# Altium PCB CX3_Camera_Layout.PcbDoc
Units mil, origin at the board's own origin, x right, y up, seen from the top; angles counter-clockwise.
Board outline 2130 x 2465 mil, 6 copper layers (Top Layer, Internal Plane 1, Internal Plane 4, Internal Plane 2, Internal Plane 3, Bottom Layer), stack 48.468 mil thick; 126 components, 115 nets, 551 pads, 0 vias.
Unrouted connection lines stored in the file: 364.
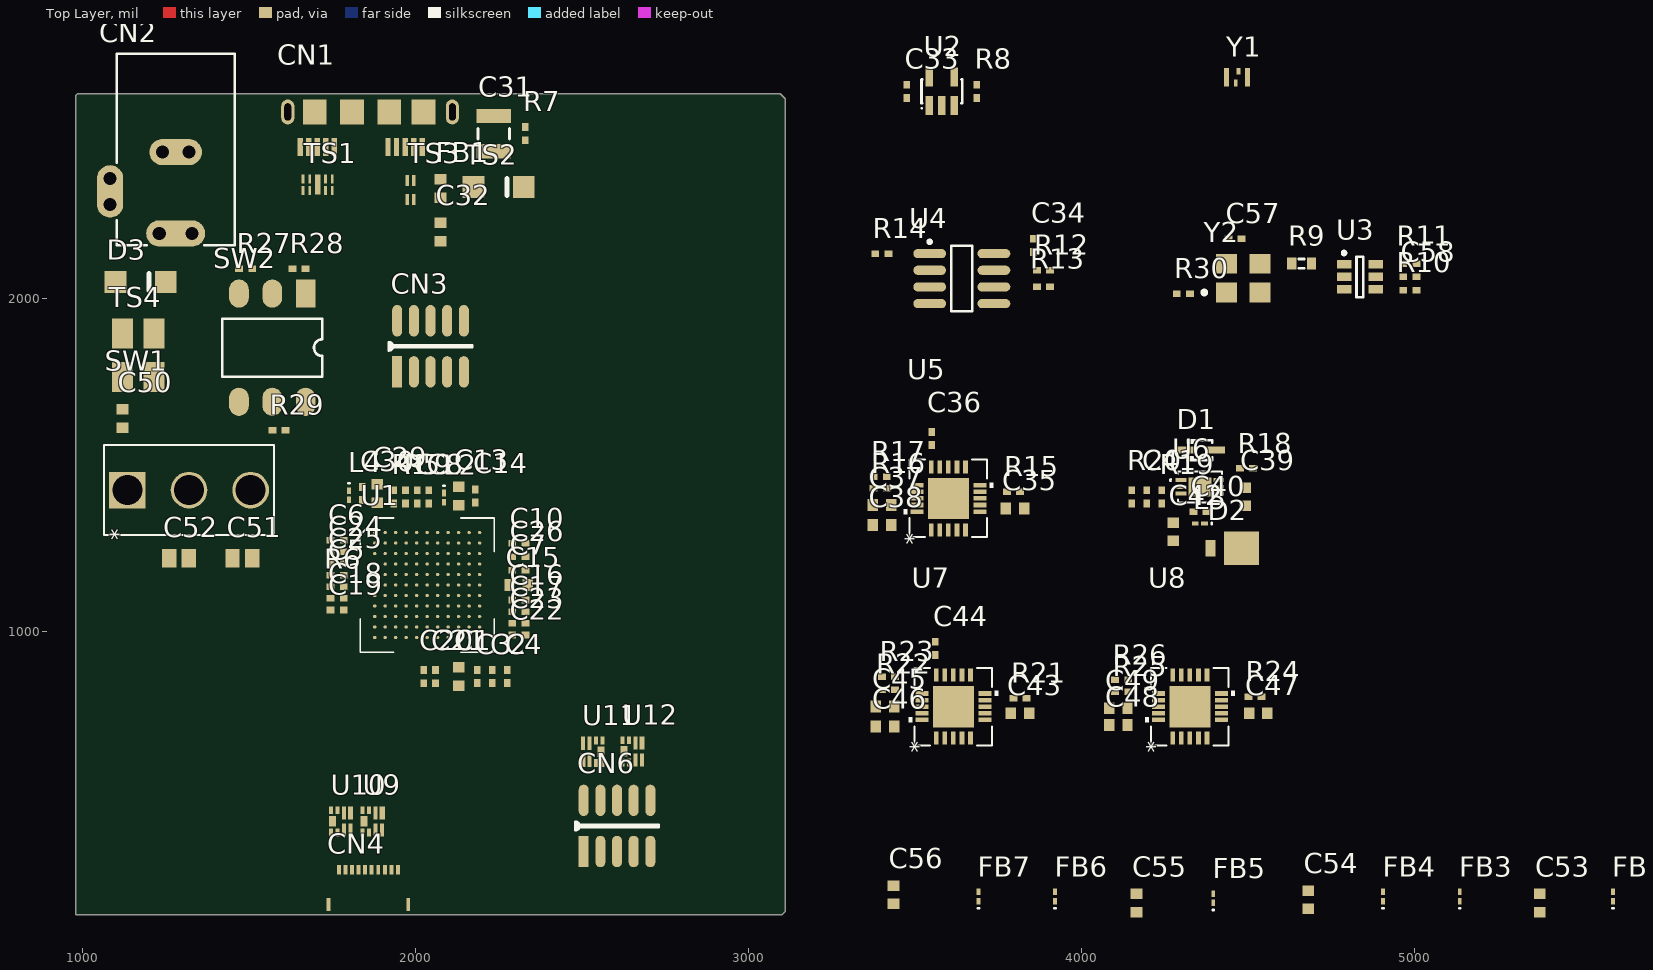
[diagram p0: Top Layer view]
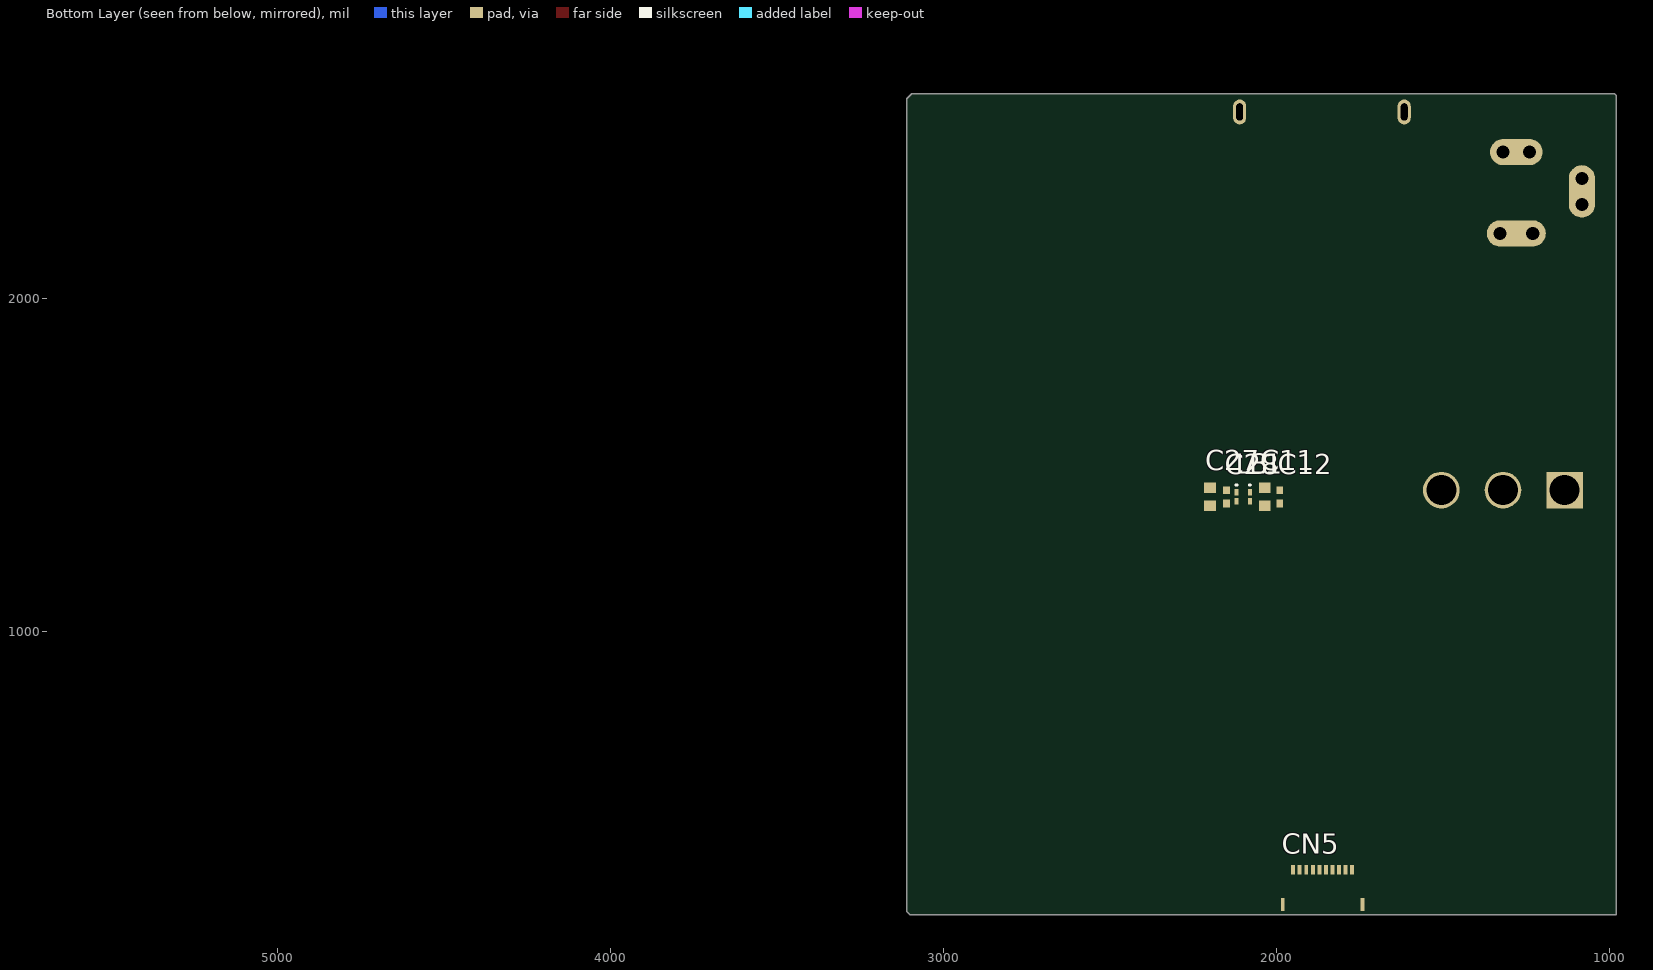
[diagram p1: Bottom Layer view, seen from below]
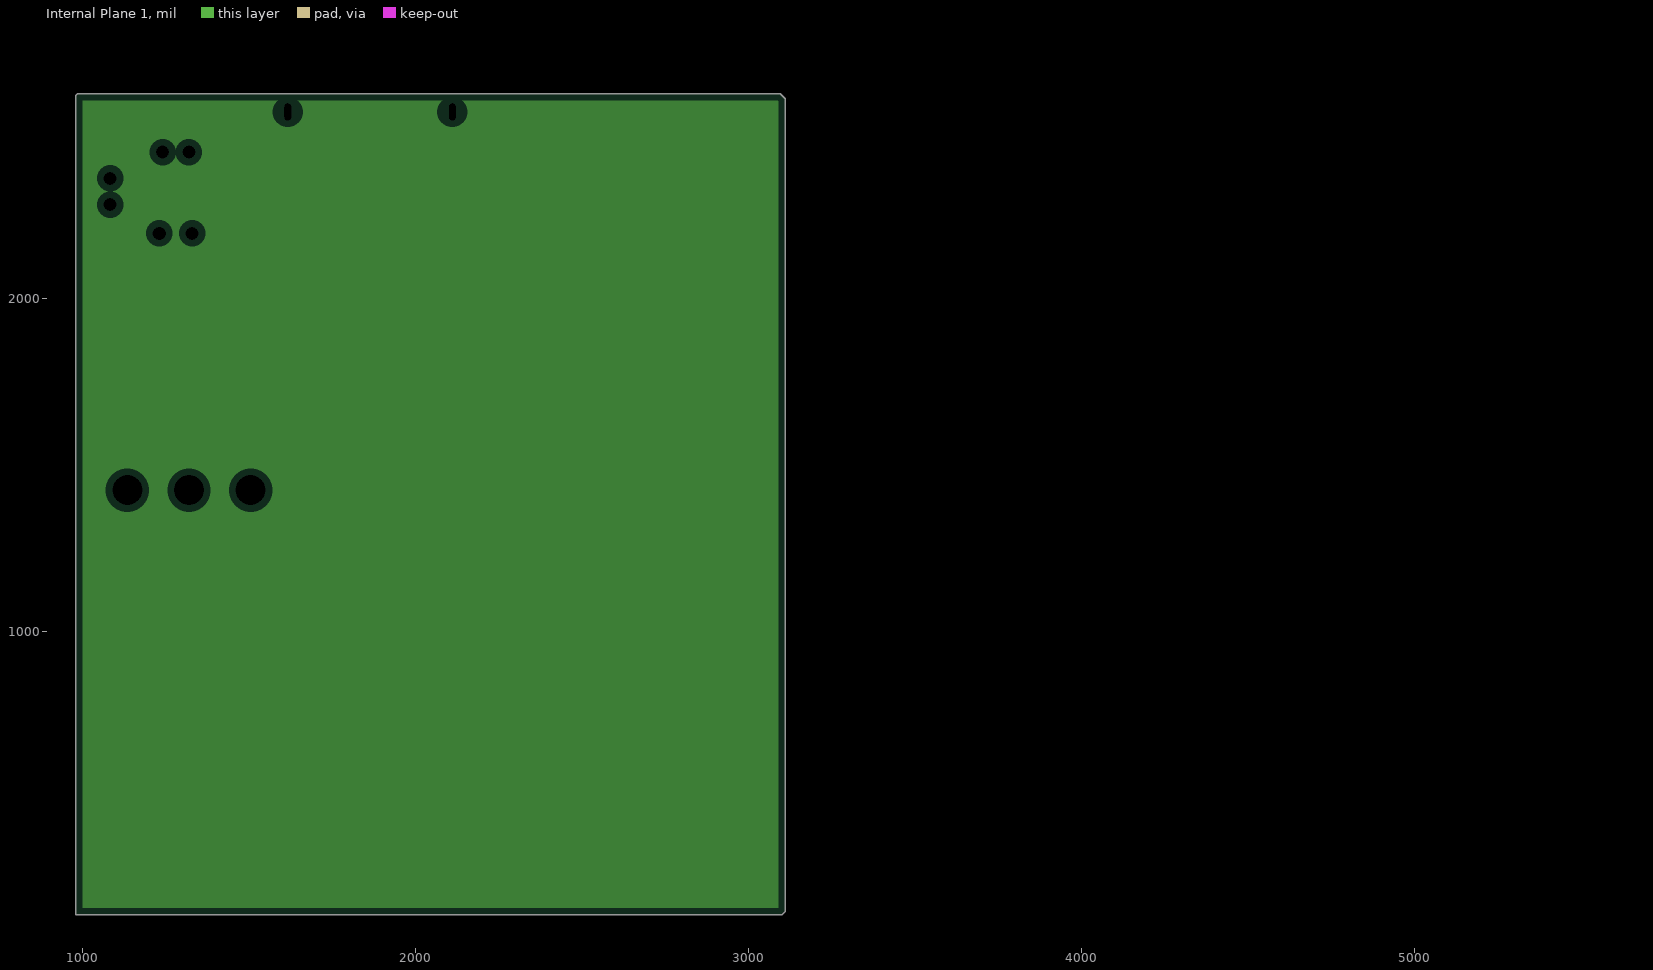
[diagram p2: Internal Plane 1, clearances drawn from the general rule]
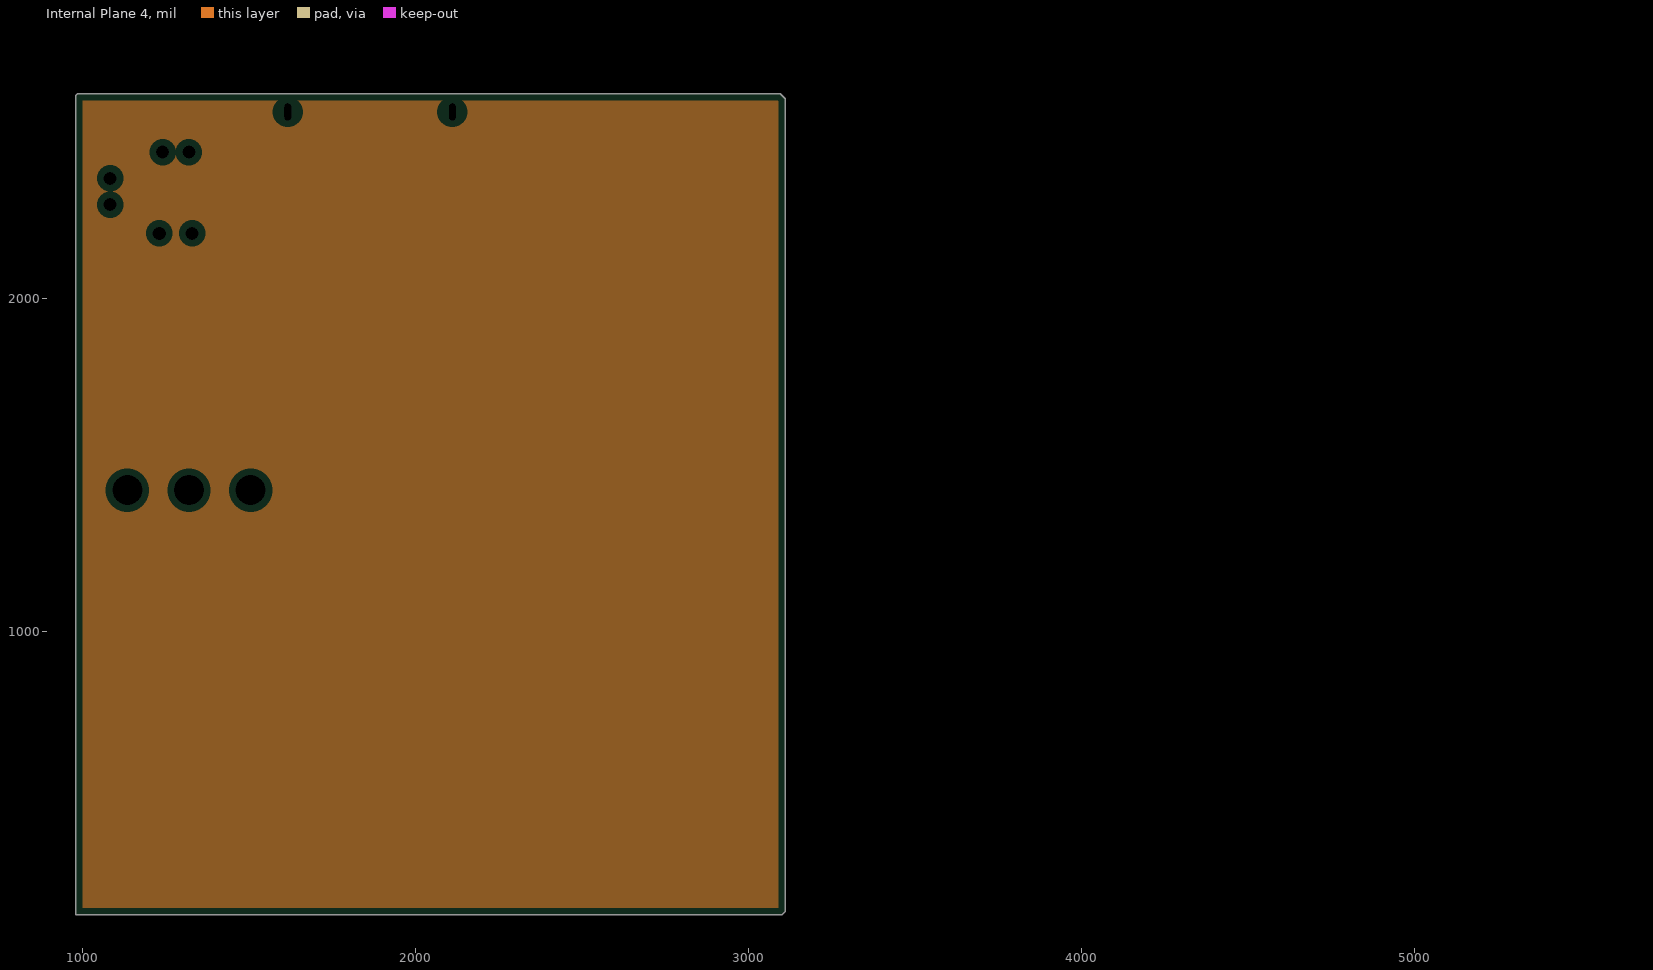
[diagram p3: Internal Plane 4, clearances drawn from the general rule]
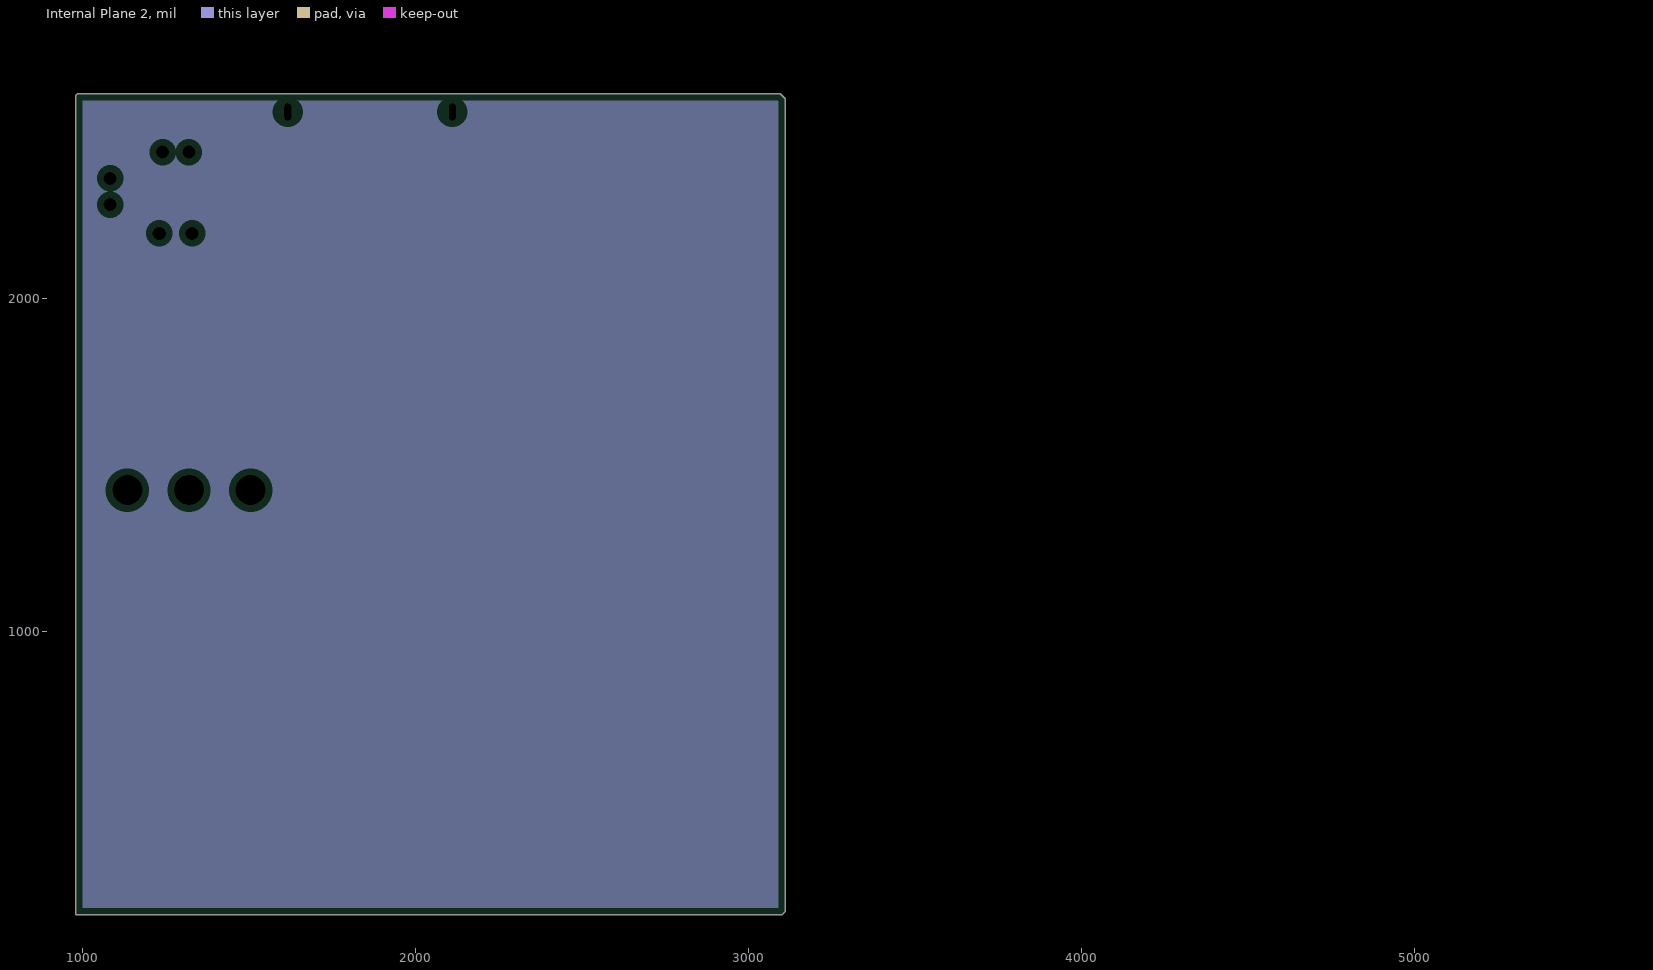
[diagram p4: Internal Plane 2, clearances drawn from the general rule]
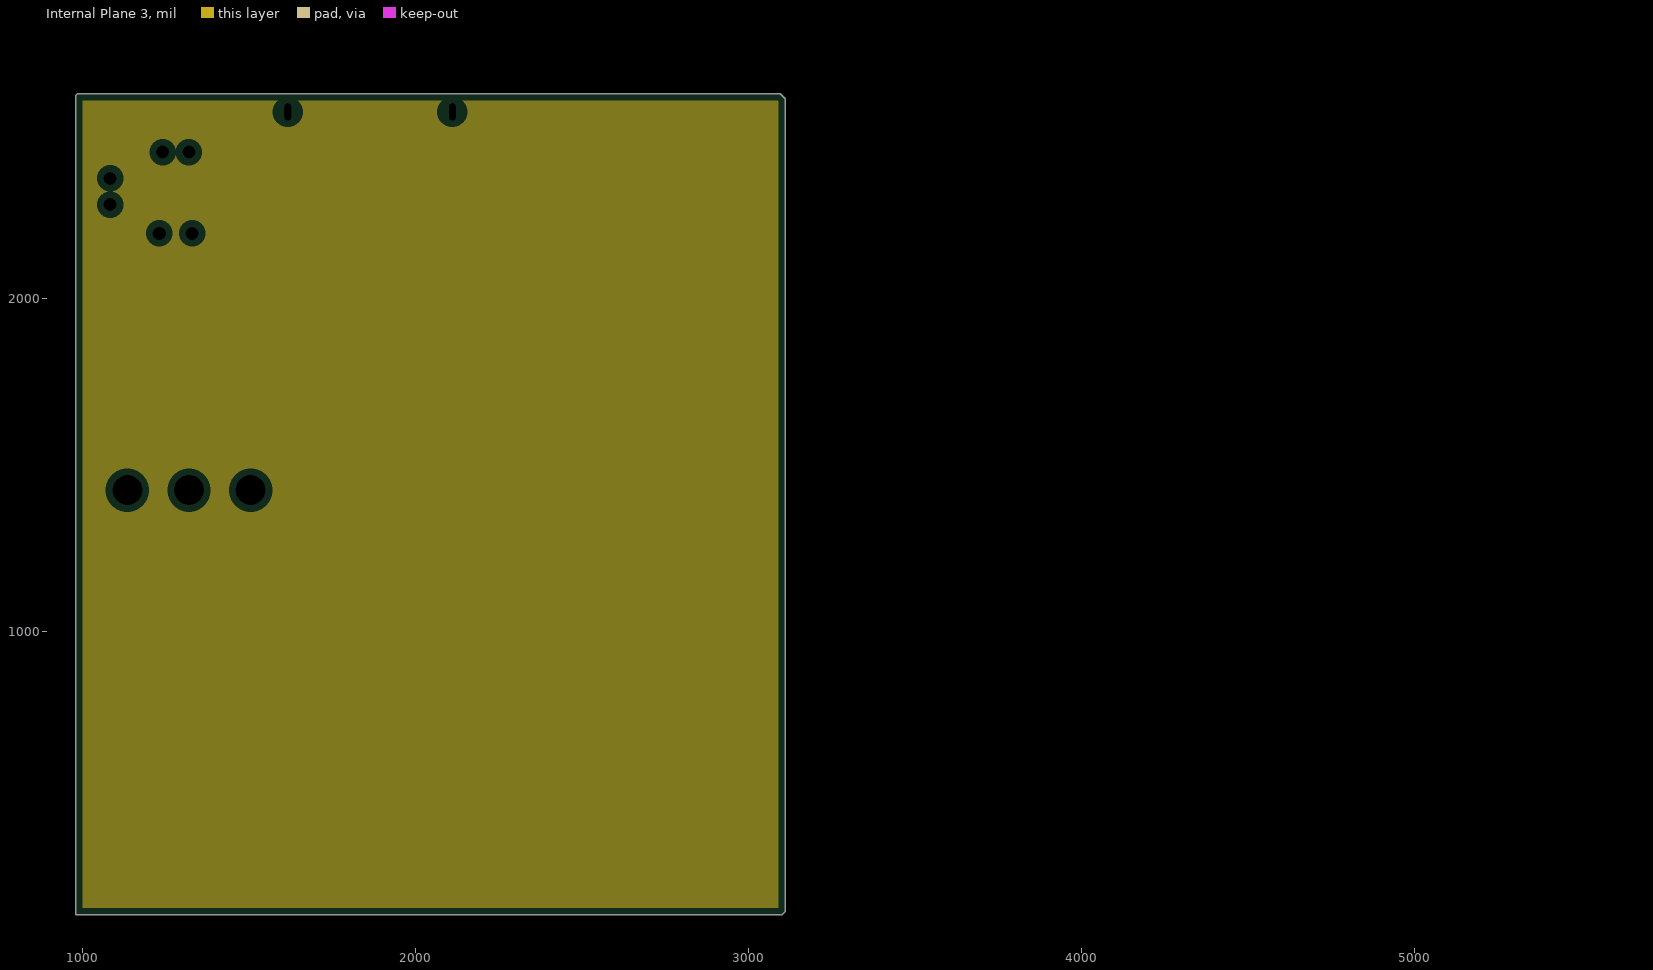
[diagram p5: Internal Plane 3, clearances drawn from the general rule]

## Layer stack, top to bottom
Top Solder: solder mask 0.4, Solder Resist, Dk 3.5
Top Layer: signal copper 1.4
Dielectric 1: core 10, FR-4, Dk 4.2
Internal Plane 1: plane copper 1.417
Dielectric 5: prepreg 5, Dk 4.2
Internal Plane 4: plane copper 1.417
Dielectric 2: core 10, Dk 4.2
Internal Plane 2: plane copper 1.417
Dielectric 4: prepreg 5, Dk 4.2
Internal Plane 3: plane copper 1.417
Dielectric 3: core 10, Dk 4.2
Bottom Layer: signal copper 1.4
Bottom Solder: solder mask 0.4, Solder Resist, Dk 3.5

## Board outline
980,150 980,2610 985,2615 3095,2615 3110,2600 3110,160 3100,150

## Design rules (kind name [scope] priority, off if disabled: settings)
Clearance [All] p1: gap=3.54
DiffPairsRouting [All] p1: maxlimit=10 minlimit=3.54 mostfreqgap=10 toplayer_minwidth=3.54 toplayer_maxwidth=15 toplayer_prefwidth=5 bottomlayer_minwidth=3.54 bottomlayer_maxwidth=15 bottomlayer_prefwidth=5 maxuncoupledlength=500
PlaneClearance [All] p1: clearance=20
PlaneConnect [All] p1: planeconnectstyle=Relief reliefexpansion=20 reliefentries=4 reliefconductorwidth=10 reliefairgap=10
PolygonConnect [All] p1: connectstyle=Relief reliefconductorwidth=10 reliefentries=4 polygonreliefangle="90 Angle" airgapwidth=10
RoutingVias [All] p1: holewidth=8 width=16 viastyle="Through Hole" minholewidth=5.91 minwidth=12 maxholewidth=28 maxwidth=50
SolderMaskExpansion [All] p1: expansion=4
Width [All] p1: maxlimit=20 minlimit=3.54 preferedwidth=5
27 further rules are at their usual default settings.

## Classes and differential pairs
net class USB: NetC8_1 NetC9_1 USB2_DATA_M USB2_DATA_P USB_SSRX_M USB_SSRX_P USB_SSTX_M USB_SSTX_P
net class MIPI: MIPI_CLKN MIPI_CLKP MIPI_DAT0_N MIPI_DAT0_P MIPI_DAT1_N MIPI_DAT1_P MIPI_DAT2_N MIPI_DAT2_P MIPI_DAT3_N MIPI_DAT3_P

## Components (designator, comment, footprint, x,y, rotation, side; value= is the part's Value field where it differs from the comment)
C1 "4.7uF 16V" 1608[0603] 2130,865 r270 top
C2 "0.1uF" 0402 2230,865.32 r270 top
C3 "0.1uF" 0402 2185,865.32 r270 top
C4 "10000pF" 0402 2275,865.32 r270 top
C5 "0.1uF" 0402 1765,1170 r180 top
C6 "0.1uF" 0402 1765,1275 r180 top
C7 "0.1uF" 0402 2310,1185 r180 top
C8 "0.1uF" 0402 2040,1405 r90 top
C9 "0.1uF" 0402 2005,1405 r90 top
C10 "10000pF" 0402 2310,1265 r0 top
C11 "4.7uF 16V" 1608[0603] 2035,1405 r270 bottom
C12 "0.1uF" 0402 1990,1405 r90 bottom
C13 "4.7uF 16V" 1608[0603] 2130,1407.56 r270 top
C14 "0.1uF" 0402 2180,1407.56 r90 top
C15 "22uF 16V" 1608[0603] 2310,1140 r180 top
C16 "0.1uF" 0402 2310,1095 r180 top
C17 "10000pF" 0402 2310,1060 r180 top
C18 "0.1uF" 0402 1765,1100 r0 top
C19 "10000pF" 0402 1765,1065 r0 top
C20 "0.1uF" 0402 2025,865 r90 top
C21 "10000pF" 0402 2060,865 r90 top
C22 "0.1uF" 0402 2310,990 r180 top
C23 "10000pF" 0402 2310,1025 r180 top
C24 "0.1uF" 0402 1765,1240 r0 top
C25 "10000pF" 0402 1765,1205 r0 top
C26 "0.1uF" 0402 2310,1225 r180 top
C27 "22uF 16V" 1608[0603] 2200,1405 r270 bottom
C28 "0.1uF" 0402 2150,1405 r90 bottom
C29 "22uF 16V" 1608[0603] 1885,1414.69 r270 top
C30 "0.1uF" 0402 1840,1414.69 r90 top
C31 "0.047uF" C1210 2235,2495 r270 top
C32 "4.7uF 16V" 1608[0603] 2075,2200 r90 top
C33 "0.1uF" 0402 3475,2622.32 r270 top
C34 "0.1uF" 0402 3855,2160 r90 top
C35 "22uF 16V" 1608[0603] 3800,1370 r180 top
C36 "0.1uF" 0402 3550,1580 r90 top
C37 "22uF 16V" 1608[0603] 3400,1380 r0 top
C38 "4.7uF 16V" 1608[0603] 3400,1320 r0 top
C39 "22uF 16V" 1608[0603] 4490,1405 r270 top
C40 "0.1uF" 0402 4355,1360 r0 top
C41 "120pF" 0402 4195,1405 r90 top
C42 "22uF 16V" 1608[0603] 4275,1300 r90 top
C43 "22uF 16V" 1608[0603] 3815,755 r180 top
C44 "0.1uF" 0402 3560,950 r270 top
C45 "22uF 16V" 1608[0603] 3410,775 r0 top
C46 "4.7uF 16V" 1608[0603] 3410,715 r0 top
C47 "22uF 16V" 1608[0603] 4530,755 r180 top
C48 "22uF 16V" 1608[0603] 4110,720 r0 top
C49 "4.7uF 16V" 1608[0603] 4110,770 r0 top
C50 "22uF 16V" 1608[0603] 1120,1640 r90 top
C51 "22uF 16V" C0805 1480,1220 r0 top
C52 "4.7uF 16V" C0805 1290,1220 r0 top
C53 "4.7uF 16V" 1608[0603] 5375,185 r90 top
C54 "4.7uF 16V" 1608[0603] 4680,195 r90 top
C55 "4.7uF 16V" 1608[0603] 4165,185 r90 top
C56 "4.7uF 16V" 1608[0603] 3435,210 r90 top
C57 "0.1uF" 0402 4460,2180 r180 top
C58 "0.1uF" 0402 4985,2065 r0 top
CN1 "GSB343K33HR" USB3MICROB 2020,2455 r180 top
CN2 "PJ-102B" KLD-0202 1280,2735 r270 top
CN3 "FTSH-105-01-F-DV-K" FTSH-105-01-F-DV-K 1945,1780 r90 top
CN4 "5034801000" 5034801000 1770,285 r0 top
CN5 "5034801000" 5034801000 1950,285 r180 bottom
CN6 "FTSH-105-01-F-DV-K" FTSH-105-01-F-DV-K 2505,340 r90 top
D1 "BAT54HT1G" SOD-323 4355,1545 r180 top
D2 "MBRM140T3G" DO-216AA 4480,1250 r180 top
D3 "BAT54HT1G" DO-214AC 1250,2050 r180 top
FB1 "BLM03AX100SN1D" 1608[0603] 2075,2330 r270 top
FB2 "BLM03AX100SN1D" 0603 5595,205 r90 top
FB3 "BLM03AX100SN1D" 0603 5135,205 r90 top
FB4 "BLM03AX100SN1D" 0603 4905,205 r90 top
FB5 "BLM03AX100SN1D" 0603 4395,200 r90 top
FB6 "BLM03AX100SN1D" 0603 3920,205 r90 top
FB7 "BLM03AX100SN1D" 0603 3690,205 r90 top
L1 "100nH, 300mA" 0603 2080,1405 r270 bottom
L2 "100nH, 300mA" 0603 2085,1402.56 r270 top
L3 "100nH, 300mA" 0603 2120,1405 r270 bottom
L4 "100nH, 300mA" 0603 1800,1409.69 r270 top
L5 "2.2uH, 1.72A" 0603 4355,1325 r180 top
R1 "22E" 0402 1935,1405 r90 top
R5 "10K" 0402 1970,1405 r270 top
R6 "10K" 0402 1765,1135 r0 top
R7 "1M" 0402 2330,2495 r270 top
R8 "10K" 0402 3685,2622.32 r270 top
R9 "22E" J1-0603 4660,2105 r0 top
R10 "22E" 0402 4985,2025 r180 top
R11 "22E" 0402 4985,2105 r180 top
R12 "4.7K" 0402 3885,2085 r0 top
R13 "100K 1%" 0402 3885,2035 r0 top
R14 "4.7K" 0402 3400,2135 r180 top
R15 "10K" 0402 3795,1420 r180 top
R16 "3.57K 1%" 0402 3395,1430 r0 top
R17 "1.15K 1%" 0402 3395,1465 r180 top
R18 "10K" 0402 4495,1490 r180 top
R19 "26.1K 1%" 0402 4240,1405 r90 top
R20 "20K 1%" 0402 4150,1405 r90 top
R21 "10K" 0402 3815,800 r180 top
R22 "3.57K 1%" 0402 3420,825 r0 top
R23 "1.43K 1%" 0402 3420,865 r180 top
R24 "10K" 0402 4520,805 r180 top
R25 "2.49K 1%" 0402 4120,820 r0 top
R26 "4.99K 1%" 0402 4120,855 r180 top
R27 "10K" 0402 1490,2090 r180 top
R28 "10K" 0402 1650,2090 r0 top
R29 "10K" 0402 1590,1605 r180 top
R30 "10K" 0402 4305,2015 r180 top
SW1 "1101M2S3CQE2" 1101M2S3CQE2 1505,1425 r90 top
SW2 "SDA03H0SBR" SDA03H0SBR 1670,2015 r270 top
TS1 "RCLAMP0524J.TCT" RCLAMP0524J 1750,2325 r180 top
TS2 "SMAJ5.0A" DO-214AC 2325,2335 r180 top
TS3 "744230900" 744230900 1995,2355 r270 top
TS4 "DLW5BSN102SQ2L" SRF0504-102Y 1215,1765 r180 top
U1 "CYUSB3065" BGA121C80P11X11_1000X1000X170B30N 2035,1140 r0 top
U2 "NCP361SNT1G" SOT-23-5 3580,2622.32 r0 top
U3 "SN74LVC2G17DBVR" SOT-23_A_N 4835,2065 r0 top
U4 "M25P40-VMN6PB" SO8_M 3640,2060 r0 top
U5 "TPS74801RGWR" RGW20_3P15X3P15 3600,1400 r90 top
U6 "LT3503EDCB#TRMPB" DFN-6_DCB 4355,1435 r0 top
U7 "TPS74801RGWR" RGW20_3P15X3P15 3615,775 r90 top
U8 "TPS74801RGWR" RGW20_3P15X3P15 4325,775 r90 top
U9 "SZEMI2121MTTAG" SZEMI2121MTTAG 1900,405 r180 top
U10 "SZEMI2121MTTAG" SZEMI2121MTTAG 1805,405 r180 top
U11 "SZEMI2121MTTAG" SZEMI2121MTTAG 2502.91,665 r0 top
U12 "SZEMI2121MTTAG" SZEMI2121MTTAG 2680,615 r180 top
Y1 "SIT1533AI-H4-DCC-32.768E" SIT1533 4435,2665 r0 top
Y2 "SG-210STF 19.2000ML" SG5032 4435,2105 r0 top

## Footprints (in the part's own frame and the unit in brackets; to place one, negate y for a bottom-side part, rotate by r counter-clockwise, add the part's x,y. Pads: shape width x height; smd on the part's side, far side on the other; paste and mask are expansions set on the pad)
0402 [mm] "Chip Capacitor, Body 1.0x0.5mm, IPC High Density"
  rect 0.6x0.5 smd: 1(-0.5,0) 2(0.5,0)
  body extent -0.55,-0.3 0.55,0.3, height 1.3
0603 [mm] "Chip Inductor, Body 0.6x0.3mm, IPC High Density"
  rect 0.5x0.3 smd: 1(-0.35,0) 2(0.35,0)
  silkscreen extent -0.9,-0.05 -0.9,0.05, body extent -0.33,-0.18 0.33,0.18, height 0.55
1101M2S3CQE2 [mil]
  rect 110x110 / inner round 60 / far side rect 110x110 hole 90: 1(0,370)
  round 110 / inner round 60 / far side round 110 hole 90: 2(0,185) 3(0,0)
  silkscreen extent -135,-70 135,440, body extent -138,-65 134,435, height 522
1608[0603] [mm] "Chip Capacitor, Body 1.6x0.8mm, IPC High Density"
  rect 0.8x0.9 smd: 1(-0.7,0) 2(0.7,0)
  body extent -0.87,-0.48 0.87,0.48, height 1.3
744230900 [mm] "Common Mode Choke"
  rect 0.85x0.25 smd: 1(0,0) 2(1.45,0) 3(0,-0.5) 4(1.45,-0.5)
5034801000 [mm]
  rect 0.3x0.7 smd: 1(0,0) 2(0.5,0) 3(1,0) 4(1.5,0) 5(2,0) 6(2.5,0) 7(3,0) 8(3.5,0) 9(4,0) 10(4.5,0)
  rect 0.3x1 smd: 11(-0.79,-2.65) 20(5.29,-2.65)
  body extent -1.15,-3.3 5.55,0.3, height 1.88
BGA121C80P11X11_1000X1000X170B30N [mm] "Ball Grid Array (BGA), 0.80 mm pitch,square;121 pin,10.00 mm L X 10.00 mm W X 1.70 mm H body"
  round 0.25 smd: A1(-4,4) A2(-3.2,4) A3(-2.4,4) A4(-1.6,4) A5(-0.8,4) A6(0,4) A7(0.8,4) A8(1.6,4) A9(2.4,4) A10(3.2,4) A11(4,4) B1(-4,3.2) B2(-3.2,3.2) B3(-2.4,3.2) B4(-1.6,3.2) B5(-0.8,3.2) B6(0,3.2) B7(0.8,3.2) B8(1.6,3.2) B9(2.4,3.2) B10(3.2,3.2) B11(4,3.2) C1(-4,2.4) C2(-3.2,2.4) C3(-2.4,2.4) C4(-1.6,2.4) C5(-0.8,2.4) C6(0,2.4) C7(0.8,2.4) C8(1.6,2.4) C9(2.4,2.4) C10(3.2,2.4) C11(4,2.4) D1(-4,1.6) D2(-3.2,1.6) D3(-2.4,1.6) D4(-1.6,1.6) D5(-0.8,1.6) D6(0,1.6) D7(0.8,1.6) D8(1.6,1.6) D9(2.4,1.6) D10(3.2,1.6) D11(4,1.6) E1(-4,0.8) E2(-3.2,0.8) E3(-2.4,0.8) E4(-1.6,0.8) E5(-0.8,0.8) E6(0,0.8) E7(0.8,0.8) E8(1.6,0.8) E9(2.4,0.8) E10(3.2,0.8) E11(4,0.8) F1(-4,0) F2(-3.2,0) F3(-2.4,0) F4(-1.6,0) F5(-0.8,0) F6(0,0) F7(0.8,0) F8(1.6,0) F9(2.4,0) F10(3.2,0) F11(4,0) G1(-4,-0.8) G2(-3.2,-0.8) G3(-2.4,-0.8) G4(-1.6,-0.8) G5(-0.8,-0.8) G6(0,-0.8) G7(0.8,-0.8) G8(1.6,-0.8) G9(2.4,-0.8) G10(3.2,-0.8) G11(4,-0.8) H1(-4,-1.6) H2(-3.2,-1.6) H3(-2.4,-1.6) H4(-1.6,-1.6) H5(-0.8,-1.6) H6(0,-1.6) H7(0.8,-1.6) H8(1.6,-1.6) H9(2.4,-1.6) H10(3.2,-1.6) H11(4,-1.6) J1(-4,-2.4) J2(-3.2,-2.4) J3(-2.4,-2.4) J4(-1.6,-2.4) J5(-0.8,-2.4) J6(0,-2.4) J7(0.8,-2.4) J8(1.6,-2.4) J9(2.4,-2.4) J10(3.2,-2.4) J11(4,-2.4) K1(-4,-3.2) K2(-3.2,-3.2) K3(-2.4,-3.2) K4(-1.6,-3.2) K5(-0.8,-3.2) K6(0,-3.2) K7(0.8,-3.2) K8(1.6,-3.2) K9(2.4,-3.2) K10(3.2,-3.2) K11(4,-3.2) L1(-4,-4) L2(-3.2,-4) L3(-2.4,-4) L4(-1.6,-4) L5(-0.8,-4) L6(0,-4) L7(0.8,-4) L8(1.6,-4) L9(2.4,-4) L10(3.2,-4) L11(4,-4)
  silkscreen extent -5.21,-5.11 5.11,5.21, body extent -5,-5 5,5, height 1.7
C0805 [mm] "Chip Capacitor, Body 2.0x1.3mm, IPC High Density"
  rect 1.1x1.4 smd: 1(-0.75,0) 2(0.75,0)
  body extent -1.1,-0.72 1.1,0.72, height 1.4
C1210 [mm] "Chip Capacitor, Body 3.2x2.5mm, IPC High Density"
  rect 1.1x2.6 smd: 1(-1.35,0) 2(1.35,0)
  silkscreen extent -0.4,-1.2 0.4,1.2, body extent -1.7,-1.35 1.7,1.35, height 1.3
DFN-6_DCB [mil]
  rect 32x12 smd: 1(-57,19.68) 2(-57,0) 3(-57,-19.68) 4(57,-19.68) 5(57,0) 6(57,19.68)
  rect 69x57 smd paste-34: 7(0,0)
  silkscreen extent -90,-46 66,46, body extent -63,-42 63,42, height 32
DO-214AC [mm]
  rect 1.65x1.67 smd: 1(0,0) 2(3.83,0)
  silkscreen extent 1.27,-0.63 1.27,0.64
DO-216AA [mil] "DO-216AA"
  rect 105.12x100 smd: 1(0,0)
  rect 30x50 smd: 2(92.56,0)
FTSH-105-01-F-DV-K [mm]
  rect 2.4x0.76 smd: 1(0,0)
  oval 2.4x0.76 smd: 2(3.9,0) 3(0,-1.27) 4(3.9,-1.27) 5(0,-2.54) 6(3.9,-2.54) 7(0,-3.81) 8(3.9,-3.81) 9(0,-5.08) 10(3.9,-5.08)
  silkscreen extent 1.63,-5.71 2.27,0.64, body extent -1.06,-5.71 4.79,0.63, height 6.11
J1-0603 [mm] "Chip Resistor, Body 1.6x0.8mm, IPC High Density"
  rect 0.7x0.9 smd: 1(-0.75,0) 2(0.75,0)
  silkscreen extent -0.2,-0.35 0.2,0.35, body extent -0.85,-0.48 0.85,0.48, height 0.9
KLD-0202 [mm] "DC Power Jack, 2.5mm, KLD Series, PCB Mount"
  oval 2x4.5 all layers, no hole: 1(13.7,0)
  round 1.5 hole 1: 1A(13.7,-1.25) 1B(13.7,1.25) 2A(7.5,-1) 2B(7.5,1) 3A(9.5,-5) 3B(11.5,-5)
  oval 2x4 all layers, no hole: 2(7.5,0)
  oval 4x2 all layers, no hole: 3(10.5,-5)
  silkscreen extent 0,-4.5 14.6,4.5
RCLAMP0524J [mil] "TVS DIODE 5VWM 15VC 8SLP"
  rect 8x27 smd: 1(0,-34) 2(20,-34) 3(68,-34) 4(88,-34) 5(88,0) 6(68,0) 7(20,0) 8(0,0)
  rect 16x61 smd: 9(44,-17.5)
RGW20_3P15X3P15 [mm]
  rect 1x0.35 smd paste-0.175: 1(-2.4,1.3) 2(-2.4,0.65) 3(-2.4,0) 4(-2.4,-0.65) 5(-2.4,-1.3) 11(2.4,-1.3) 12(2.4,-0.65) 13(2.4,0) 14(2.4,0.65) 15(2.4,1.3)
  rect 0.35x1 smd paste-0.175: 6(-1,-2.4) 7(-0.5,-2.4) 8(0,-2.4) 9(0.5,-2.4) 10(1,-2.4) 16(1,2.4) 17(0.5,2.4) 18(0,2.4) 19(-0.5,2.4) 20(-1,2.4)
  rect 3.15x3.15 smd paste-1.562 mask-1.562: 21(0,0)
  silkscreen extent -2.96,-3.41 2.96,3.41, body extent -2.63,-2.63 2.63,2.63, height 1
SDA03H0SBR [mm]
  rect 2.15x1.5 smd: 1(0,0)
  oval 2.15x1.5 smd: 2(0,-2.54) 3(0,-5.08) 4(8.25,-5.08) 5(8.25,-2.54) 6(8.25,0)
  silkscreen extent 1.91,-6.35 6.34,1.27, body extent -0.5,-7.3 8.8,2.3, height 4.5
SG5032 [mm]
  rect 1.6x1.5 smd: 1(0,-2.2) 2(2.54,-2.2) 3(2.54,0) 4(0,0)
  silkscreen extent -1.84,-2.34 -1.56,-2.06, body extent -1.2,-2.7 3.8,0.5, height 1.3
SIT1533 [mm] "32.768 kHz Quartz XTAL Replacement"
  rect 0.4x1.4 smd: 1(0,0) 3(1.6,0)
  rect 0.3x0.5 smd: 2(0.7,-0.45) 4(0.9,0.45)
SO8_M [mm] "SOIC, 8-Leads, Body 4.9x3.9mm, Pitch 1.27mm, IPC Low Density"
  oval 2.5x0.7 smd: 1(-2.45,1.905) 2(-2.45,0.635) 3(-2.45,-0.635) 4(-2.45,-1.905) 5(2.45,-1.905) 6(2.45,-0.635) 7(2.45,0.635) 8(2.45,1.905)
  silkscreen extent -2.57,-2.5 0.8,2.93, body extent -2,-2.5 2,2.5, height 1.75
SOD-323 [mm] "SOD-323/SC-76; 2 Leads; Body 1.7 x 1.3 mm, (LxW)"
  rect 1.45x0.55 smd: 1(1.175,0) 2(-1.175,0)
  silkscreen extent -0.95,-0.75 0.95,0.75
SOT-23-5 [mm] "SOT-23/SC-74A; 5 Leads; Body 3.1 x 3.1 mm, inc. leads (LxW max)"
  rect 0.55x1.45 smd: 1(-0.95,-1.075) 2(0,-1.075) 3(0.95,-1.075) 4(0.95,1.075) 5(-0.95,1.075)
  silkscreen extent -1.57,-1.35 1.55,0.9
SOT-23_A_N [mm] "SOT23, 6-Leads, Body 2.9x1.7mm, Pitch 0.95mm, Lead Span 2.8mm, IPC Medium Density"
  rect 1.1x0.65 smd: 1(-1.2,0.95) 2(-1.2,0) 3(-1.2,-0.95) 4(1.2,-0.95) 5(1.2,0) 6(1.2,0.95)
  silkscreen extent -1.32,-1.55 0.25,1.95, body extent -0.9,-1.55 0.9,1.55, height 1.45
SRF0504-102Y [mm]
  rect 1.6x2.3 smd: 1(2.4,0) 2(0,0) 3(0,-3.3) 4(2.4,-3.3)
  body extent -1.3,-4.2 3.7,1, height 4.8
SZEMI2121MTTAG [mm]
  rect 0.4x1 smd: 1(0,-1.3)
  rect 0.3x1 smd: 2(0.5,-1.3) 7(0.5,0) 8(0,0)
  rect 0.3x0.6 smd: 3(1,-1.5) 4(1.5,-1.5) 5(1.5,0.2) 6(1,0.2)
  rect 0.54x0.8 smd: 9(1.38,-0.65)
USB3MICROB [mm] "USB 3.0 Micro B Receptacle"
  oval 1x1.9 hole 0.5 slot 1.3 at 90 deg: 0(-2.3,-2.675) 0(10.25,-2.675)
  rect 1.8x1.9 smd: 0(-0.1,-2.675) 0(2.5,-2.675) 0(5.35,-2.675) 0(8.2,-2.675)
  rect 0.4x1.35 smd: 1(0,0) 2(0.65,0) 3(1.3,0) 4(1.95,0) 5(2.6,0) 6(6.7,0) 7(7.35,0) 8(8,0) 9(8.65,0) 10(9.3,0)
  body extent -2.7,-5.52 10.71,0.4, height 2.73

## Part data
C1 C2 C3 C4 C5 C6 C7 C8 C9 C10 C11 C12 C13 C14 C15 C16 C17 C18 C19 C20 C21 C22 C23 C24 C25 C26 C27 C28 C29 C30 C31 C32 C33 C34 C35 C36 C37 C38 C39 C40 C41 C42 C43 C44 C45 C46 C47 C48 C49 C50 C51 C52 C53 C54 C55 C56 C57 C58: library part "Cap Semi", "Capacitor (Semiconductor SIM Model)"
CN2: library part PWR2.5, "Low Voltage Power Supply Connector"
CN3 CN6: library part MHDR2X5, "Header, 5-Pin, Dual row"
CN4 CN5: library part "Header 10", "Header, 10-Pin"
D1 D2 D3: library part BAT60B, "Silicon AF Schottky Rectifier Diode"
FB1 FB2 FB3 FB4 FB5 FB6 FB7 L1 L2 L3 L4 L5: library part Inductor, "Inductor"
R1 R5 R6 R7 R8 R9 R10 R11 R12 R13 R14 R15 R16 R17 R18 R19 R20 R21 R22 R23 R24 R25 R26 R27 R28 R29 R30: library part Res3, "Resistor"
SW1 U5 U6 U7 U8: "Imported"
TS1: library part RCLAMP0524J
TS2: library part DL5243B, "Silicon Zener Diode"
TS3 TS4: library part CHOKE_COM
U1: "Cypress CX3"
U4: library part M25P40
Y1: library part OSCILATOR_32kHz
Y2: library part OSCILLATOR

## Nets (pads, with @x,y where several pads share a name; then routed paths per layer and width w, separated by ;. In a path a pad name is that pad's centre, name@x,y a point inside that pad or via, vN(x,y) a via of type N, cw(c..) or ccw(c..) an arc to the next point about the centre after c; other vN are vias at no path point)
CLK_19.2MHZ_CX3: R11.1 U1.D7
CLK_19.2MHZ_MIPI: R10.1 U1.F2
CLK_OSC_32K768HZ: U1.D6 Y1.3
CLK_OUT: CN6.1
CLKM_CX3: CN5.3 U1.G3
CX3_GPIO17: CN6.7 U1.D11
CX3_GPIO18: CN6.9 U1.C6
CX3_GPIO19: U1.C7
CX3_GPIO20: U1.E6
CX3_GPIO21: U1.B4
CX3_GPIO22: U1.C8
CX3_GPIO23: U1.B3
CX3_GPIO24: U1.A11
CX3_GPIO25: U1.G5
CX3_GPIO26: CN5.10 U1.C4
CX3_GPIO44: CN5.9 U1.F3
CX3_GPIO45: U1.C9
CX3_I2C_SCL: CN5.7 U1.D9
CX3_I2C_SDA: CN5.5 U1.D10
CX3_NRST: U1.C5
CX3_PMODE0: SW2.2 U1.G4
CX3_PMODE1: SW2.4 U1.H4
CX3_PMODE2: SW2.6 U1.L4
CX3_SPI_MISO: U1.C2 U4.2
CX3_SPI_MOSI: U1.D5 U4.5
CX3_SPI_SCK: R1.1 R13.1 U4.6
CX3_SPI_SSN: R14.1 U1.C1 U4.1
GND: C1.2 C2.2 C3.2 C4.2 C5.2 C6.2 C7.1 C10.2 C11.1 C12.2 C13.1 C14.2 C15.1 C16.1 C17.1 C18.1 C19.1 C20.1 C21.1 C22.1 C23.1 C24.1 C25.1 C26.1 C27.1 C28.2 C29.1 C30.2 C31.2 C32.1 C33.1 C34.2 C35.1 C36.1 C37.1 C38.1 C39.2 C42.1 C43.1 C44.1 C45.1 C46.1 C47.1 C48.1 C49.1 C50.1 C51.1 C52.1 C53.2 C54.1 C55.2 C56.2 C57.1 C58.2 CN1.5 CN1.8 CN3.3 CN3.5 CN3.9 CN6.4 D2.2 FB2.2 FB5.2 FB7.2 R5.1 R7.2 R17.2 R20.1 R23.2 R26.2 R29.1 TS1.9 TS2.1 TS4.3 U1.A1 U1.A8 U1.B2 U1.B7 U1.B8 U1.B9 U1.D8 U1.E2 U1.E11 U1.G1 U1.G11 U1.K3 U1.K4 U1.L1 U1.L2 U1.L3 U1.L6 U1.L11 U2.2 U2.3 U3.2 U4.3 U4.4 U5.12 U5.21 U6.2 U6.7 U7.12 U7.21 U8.12 U8.21 U9.3 U9.4 U9.5 U9.6 U10.3 U10.4 U10.5 U10.6 U11.3 U11.4 U11.5 U11.6 U12.3 U12.4 U12.5 U12.6 Y1.2 Y2.2
JTAG_NTRST: CN3.10 U1.B11
JTAG_TCK: CN3.4 U1.F6
JTAG_TDI: CN3.8 U1.E7
JTAG_TDO: CN3.6 U1.C10
JTAG_TMS: CN3.2 U1.E8
MIPI_CAM_PWDN: CN5.2 U1.G2
MIPI_CAM_RST: CN5.1 U1.F4
MIPI_CLKN: CN4.9 U1.K7
MIPI_CLKP: CN4.10 U1.J7
MIPI_DAT0_+: CN4.7 U9.8
MIPI_DAT0_-: CN4.6 U9.7
MIPI_DAT0_N: U1.K5 U9.2
MIPI_DAT0_P: U9.1
MIPI_DAT1_+: CN4.4 U10.8
MIPI_DAT1_-: CN4.3 U10.7
MIPI_DAT1_N: U1.K6 U10.2
MIPI_DAT1_P: U1.J6 U10.1
MIPI_DAT2_+: CN6.2 U11.8
MIPI_DAT2_-: CN6.3 U11.7
MIPI_DAT2_N: U1.J9 U11.2
MIPI_DAT2_P: U1.J8 U11.1
MIPI_DAT3_+: CN6.5 U12.8
MIPI_DAT3_-: CN6.6 U12.7
MIPI_DAT3_N: U1.K8 U12.2
MIPI_DAT3_P: U1.L8 U12.1
NetC8_1: C8.1 U1.A6
NetC9_1: C9.1 U1.A5
NetC31_1: C31.1 CN1.0 R7.1
NetC36_2: C36.2 U5.15
NetC40_1: C40.1 D1.1 U6.3
NetC41_2: C41.2 R19.2 R20.2 U6.1
NetC44_2: C44.2 U7.15
NetCN1_1: CN1.1 FB1.1 TS2.2
NetCN1_2: CN1.2 TS3.1
NetCN1_3: CN1.3 TS3.3
NetCN1_6: CN1.6 TS1.1
NetCN1_7: CN1.7 TS1.2
NetCN1_9: CN1.9 TS1.3
NetCN1_10: CN1.10 TS1.4
NetCN2_1: CN2.1 CN2.1A CN2.1B D3.1 TS4.2
NetCN2_2: CN2.2 CN2.2A CN2.2B CN2.3 CN2.3A CN2.3B D3.2 TS4.4
NetCN4_2: CN4.2 FB7.1
NetCN4_5: CN4.5 FB6.1
NetCN4_8: CN4.8 FB5.1
NetCN5_4: CN5.4 FB4.1
NetCN5_6: CN5.6 FB3.1
NetCN5_8: CN5.8 FB2.1
NetR1_2: R1.2 U1.D4
NetR6_2: R6.2 U1.F1
NetR8_1: R8.1 U2.4
NetR9_1: R9.1 Y2.3
NetR9_2: R9.2 U3.1 U3.3
NetR10_2: R10.2 U3.4
NetR11_2: R11.2 U3.6
NetR12_1: R12.1 U4.7
NetR15_2: R15.2 U5.9
NetR16_2: R16.2 R17.1 U5.16
NetR18_2: R18.2 U6.6
NetR21_2: R21.2 U7.9
NetR22_2: R22.2 R23.1 U7.16
NetR24_2: R24.2 U8.9
NetR25_2: R25.2 R26.1 U8.16
NetR27_2: R27.2 SW2.3
NetR28_2: R28.2 SW2.1
NetR29_2: R29.2 SW2.5
NetR30_1: R30.1 Y2.1
NRST_CAM: R5.2 U1.H6
USB2_DATA_M: TS3.2 U1.A10
USB2_DATA_P: TS3.4 U1.A9
USB_SSRX_M: TS1.6 U1.A3
USB_SSRX_P: TS1.5 U1.A4
USB_SSTX_M: C8.2 TS1.8
USB_SSTX_P: C9.2 TS1.7
VCC1P2_A: C13.2 C14.1 L2.2 U1.A7
VCC1P2_FX3_RX: C29.2 C30.1 L4.2 U1.A2
VCC1P2_FX3_TX: C27.2 C28.1 L3.2 U1.B5
VCC_1V2: C10.1 C15.2 C16.2 C17.2 C18.2 C19.2 C20.2 C21.2 C22.2 C23.2 C24.2 C25.2 C26.2 C48.2 C49.2 C56.1 CN6.10 L2.1 L3.1 L4.1 R24.1 R25.1 U1.B10 U1.C3 U1.E9 U1.F11 U1.H1 U1.J5 U1.L5 U1.L7 U8.1 U8.18 U8.19 U8.20
VCC_1V8: C41.1 C42.2 C54.2 FB4.2 L5.2 R19.1
VCC_1V8FB: C40.2 D2.1 L5.1 U6.4
VCC_2V8: C45.2 C46.2 C55.1 FB6.2 R21.1 R22.1 U7.1 U7.18 U7.19 U7.20
VCC_3V3: CN3.1
VCC_5V: C50.2 SW1.1 TS4.1
VCC_IO: C1.1 C2.1 C3.1 C4.1 C5.1 C6.1 C34.1 C37.2 C38.2 C53.1 CN4.1 CN6.8 FB3.2 L1.1 R6.1 R12.2 R13.2 R14.2 R15.1 R16.1 R27.1 R28.1 U1.B1 U1.E3 U1.H11 U1.L9 U4.8 U5.1 U5.18 U5.19 U5.20
VCC_SYS: C35.2 C39.1 C43.2 C47.2 C52.2 D1.2 R18.1 SW1.2 U5.5 U5.6 U5.7 U5.8 U5.10 U5.11 U6.5 U7.5 U7.6 U7.7 U7.8 U7.10 U7.11 U8.5 U8.6 U8.7 U8.8 U8.10 U8.11
VCC_USB: C7.2 C51.2 SW1.3 U1.E10 U2.5
VCC_USB_RAW: C32.2 C33.2 FB1.2 R8.2 U2.1
VCCIO_CLK: C11.2 C12.1 C57.2 C58.1 L1.2 R30.2 U1.B6 U3.5 Y1.4 Y2.4
pads on no net: CN1.4 CN3.7 CN4.11 CN4.20 CN5.11 CN5.20 U1.C11 U1.D1 U1.D2 U1.D3 U1.E1 U1.E4 U1.E5 U1.F5 U1.F7 U1.F8 U1.F9 U1.F10 U1.G6 U1.G7 U1.G8 U1.G9 U1.G10 U1.H2 U1.H3 U1.H5 U1.H7 U1.H8 U1.H9 U1.H10 U1.J1 U1.J2 U1.J3 U1.J4 U1.J10 U1.J11 U1.K1 U1.K2 U1.K9 U1.K10 U1.K11 U1.L10 U5.2 U5.3 U5.4 U5.13 U5.14 U5.17 U7.2 U7.3 U7.4 U7.13 U7.14 U7.17 U8.2 U8.3 U8.4 U8.13 U8.14 U8.15 U8.17 U9.9 U10.9 U11.9 U12.9 Y1.1

## Polygon pours and split planes (outlines as drawn)
no net on Internal Plane 1 (split plane): 3089.9,2591.68 3089.9,170.1 1000.1,170.1 1000.1,2594.9 3086.68,2594.9
no net on Internal Plane 4 (split plane): 3089.9,2591.68 3089.9,170.1 1000.1,170.1 1000.1,2594.9 3086.68,2594.9
no net on Internal Plane 2 (split plane): 3089.9,2591.68 3089.9,170.1 1000.1,170.1 1000.1,2594.9 3086.68,2594.9
no net on Internal Plane 3 (split plane): 3089.9,2591.68 3089.9,170.1 1000.1,170.1 1000.1,2594.9 3086.68,2594.9

## Silkscreen, mask and mechanical layers (free items; w line width, h text height)
Mechanical 13:
  the board outline again, w10

## Text inside footprints (layer, text, board x,y; h text height)
CN2: Mechanical 1 "Mech 2 - Clearance, move to internal plane if present" at 1479.44,2723.74 h11.81 r270; Mechanical 1 "Mech 1 - Slot cut-out" at 1499.13,2723.74 h11.81 r270; Mechanical 1 "Assign keep-out area to slot" at 1538.5,2723.74 h11.81 r270; Mechanical 1 "Alert PCB fab to slot details" at 1518.82,2723.74 h11.81 r270
SW1: Top Overlay "*" at 1135,1275 h50 r90; Mechanical 13 "*" at 1135,1310 h50 r90
U5: Top Overlay "*" at 3521.02,1260.83 h50 r90
U7: Top Overlay "*" at 3536.02,635.83 h50 r90
U8: Top Overlay "*" at 4246.02,635.83 h50 r90